# EAGLE board version4 (EAGLE 9.2.2)
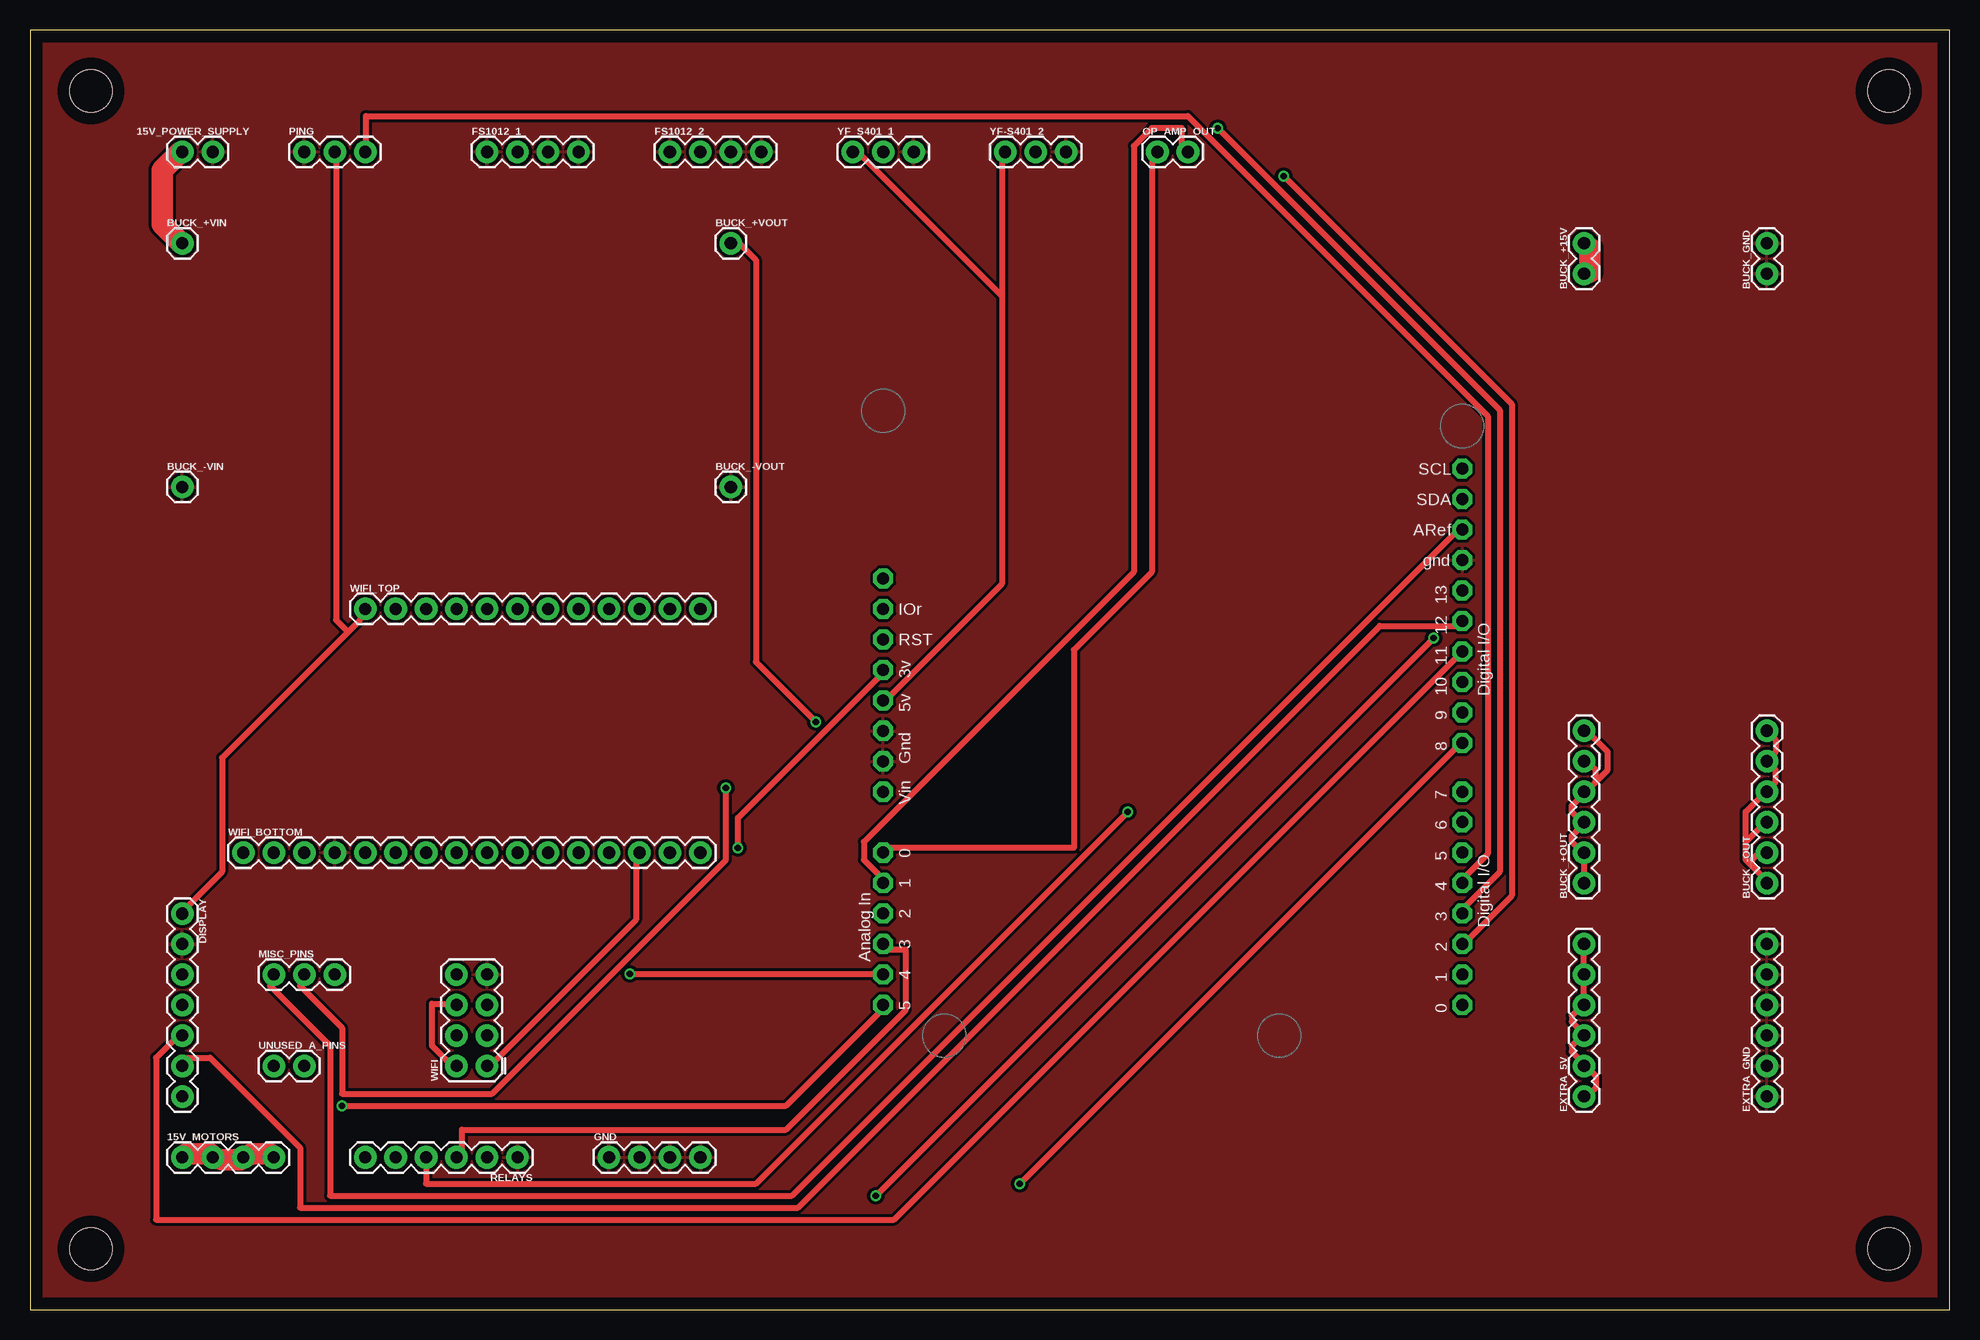
[diagram p0: board, top side]
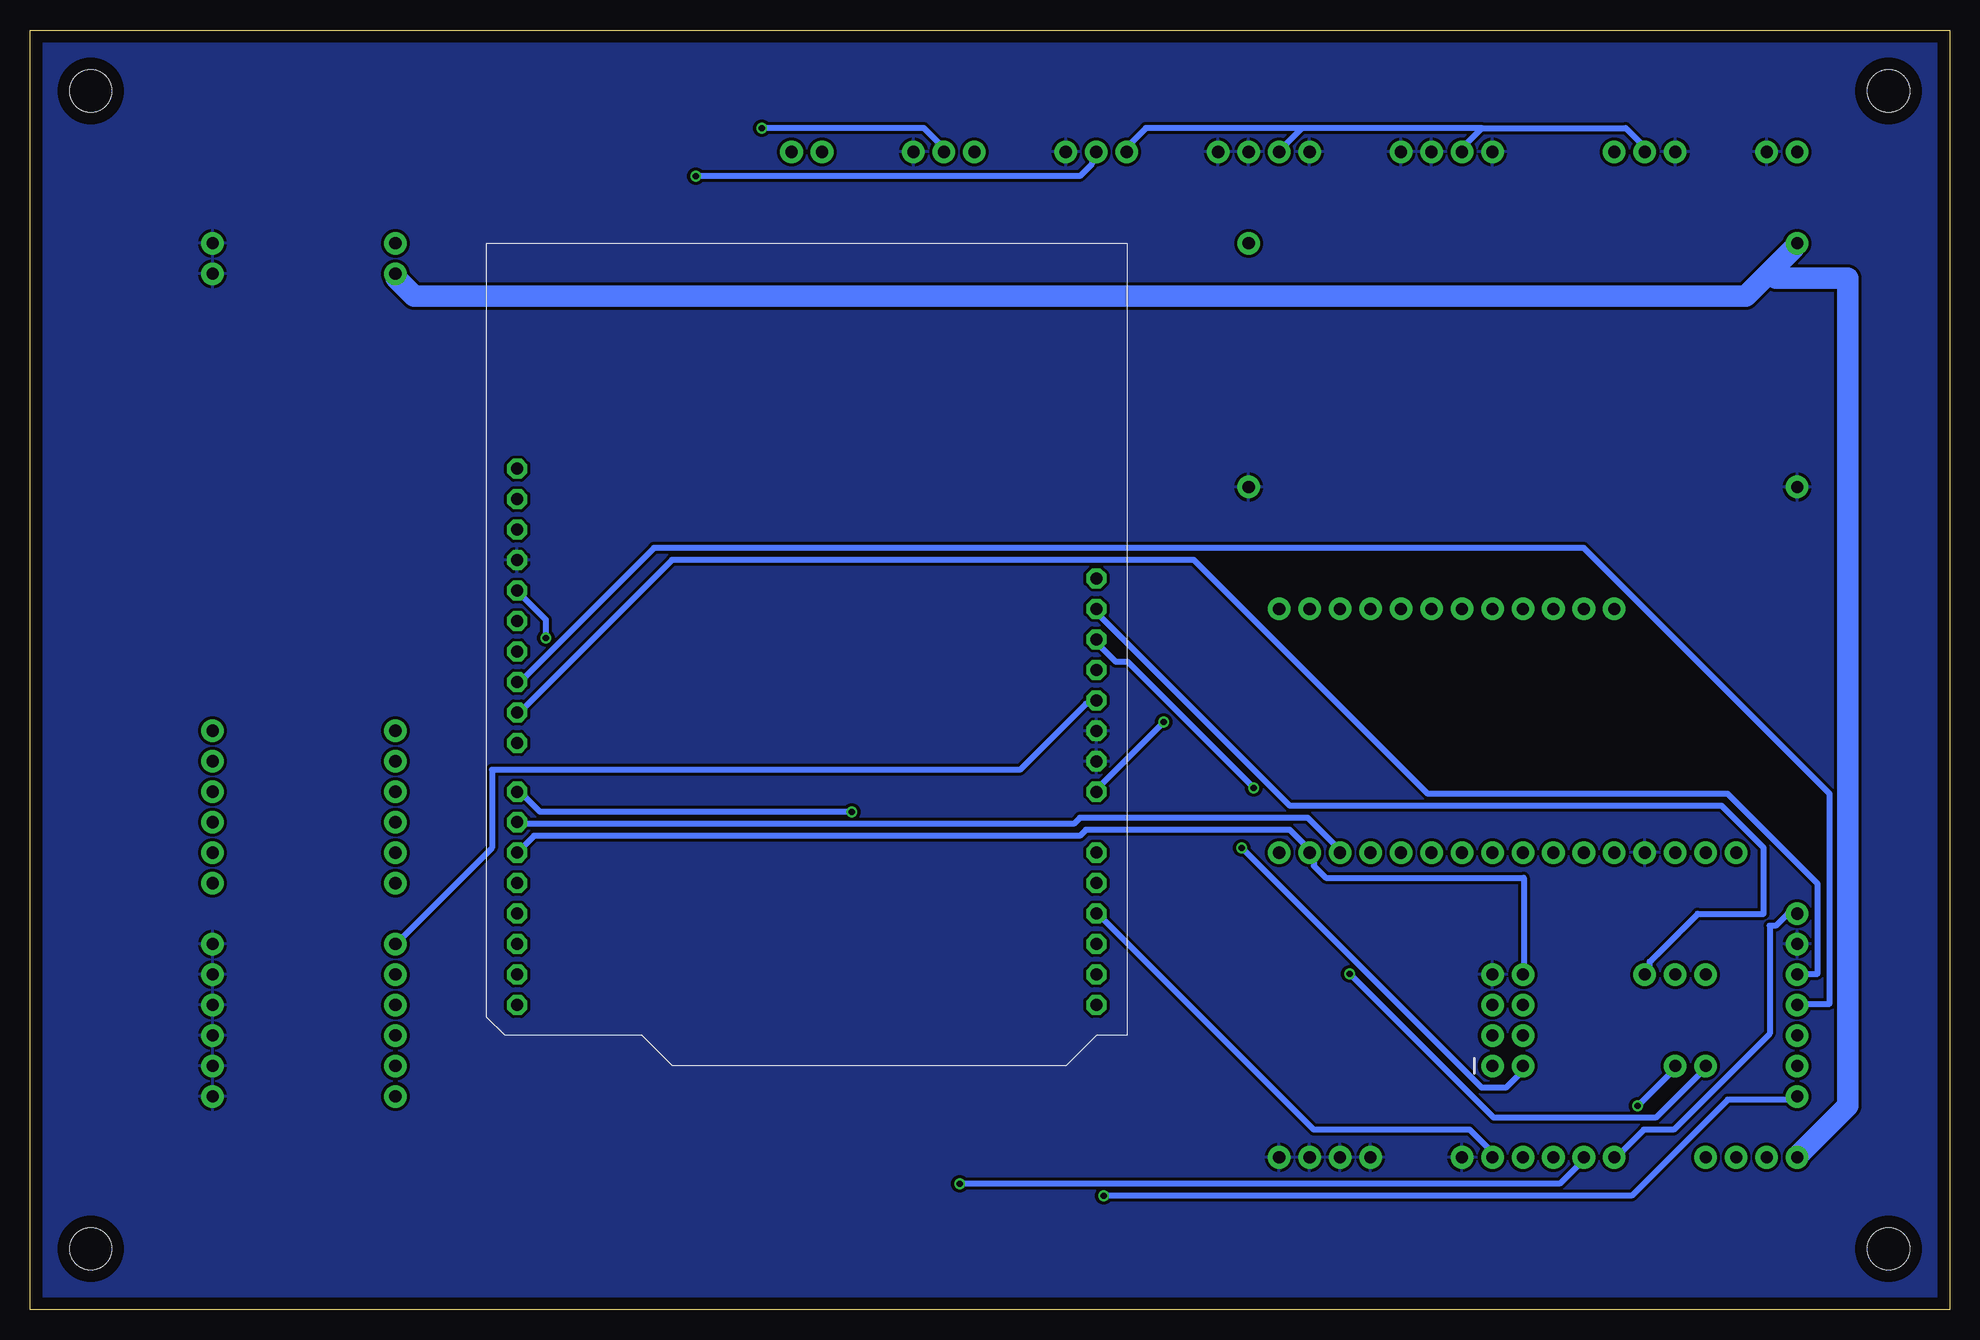
[diagram p1: board, bottom side, seen from below]

Size 160 x 106.68 mm. Coordinates in mm from the lower left corner, seen from the top.
Outline: 0,0 160,0 160,106.68 0,106.68 0,0
Copper layers (1*16): Top 0.035mm / dielectric 1.5mm / Bottom 0.035mm
Design rules "default": minimum track width 6mil, minimum drill 0.35mm, track to track 6mil, track to pad 6mil, pad to pad 6mil, via to via 6mil, smd to smd 6mil, copper to edge 40mil, drill to drill 6mil, minimum pad ring 10mil, minimum via ring 8mil, stop-mask expansion 4mil, vias tented up to drill 0mil, thermal gap 10mil
Net classes: 0 default: width 0.508 mm, drill 0.508 mm, clearance 0.254 mm; 1 +15V: width 1.778 mm, drill 0.508 mm, clearance 0.254 mm
Holes 3.5 mm at 5.08,5.08 5.08,101.6 154.94,101.6 154.94,5.08

## Footprints (pad centres in the part's own frame; a part is rotated, then mirrored left to right if it is on the bottom)
1X04 = drill 1.016 pad 1.88: 1 0,0; 2 2.54,0; 3 5.08,0; 4 7.62,0
1X02 = drill 1.016 pad 1.88: 1 0,0; 2 2.54,0
1X06 = drill 1.016 pad 1.88: 1 0,0; 2 2.54,0; 3 5.08,0; 4 7.62,0; 5 10.16,0; 6 12.7,0
1X01 = drill 1.016 pad 1.88: 1 0,0
1X07 = drill 1.016 pad 1.88: 1 0,0; 2 2.54,0; 3 5.08,0; 4 7.62,0; 5 10.16,0; 6 12.7,0; 7 15.24,0
1X03 = drill 1.016 pad 1.88: 1 0,0; 2 2.54,0; 3 5.08,0
ARDUINOR3-BPLACE = drill 1 pad 1.676 octagon: 3V 35.56,2.54; 5V 38.1,2.54; A0 50.8,2.54; A1 53.34,2.54; A2 55.88,2.54; A3 58.42,2.54; A4 60.96,2.54; A5 63.5,2.54; AREF 23.876,50.8; D0 63.5,50.8; D1 60.96,50.8; D2 58.42,50.8; D3 55.88,50.8; D4 53.34,50.8; D5 50.8,50.8; D6 48.26,50.8; D7 45.72,50.8; D8 41.656,50.8; D9 39.116,50.8; D10 36.576,50.8; D11 34.036,50.8; D12 31.496,50.8; D13 28.956,50.8; GND 26.416,50.8; GND1 43.18,2.54; GND2 40.64,2.54; IOREF 30.48,2.54; RESERVED 27.94,2.54; RESET 33.02,2.54; SCL 18.796,50.8; SDA 21.336,50.8; VIN 45.72,2.54
2X4 = drill 1.016 pad 1.88: 1 -3.81,-1.27; 2 -3.81,1.27; 3 -1.27,-1.27; 4 -1.27,1.27; 5 1.27,-1.27; 6 1.27,1.27; 7 3.81,-1.27; 8 3.81,1.27
1X16 = drill 1.016 pad 1.88: 1 0,0; 2 2.54,0; 3 5.08,0; 4 7.62,0; 5 10.16,0; 6 12.7,0; 7 15.24,0; 8 17.78,0; 9 20.32,0; 10 22.86,0; 11 25.4,0; 12 27.94,0; 13 30.48,0; 14 33.02,0; 15 35.56,0; 16 38.1,0
1X12 = drill 1.016 pad 1.88: 1 0,0; 2 2.54,0; 3 5.08,0; 4 7.62,0; 5 10.16,0; 6 12.7,0; 7 15.24,0; 8 17.78,0; 9 20.32,0; 10 22.86,0; 11 25.4,0; 12 27.94,0

## Placement (x,y rotation side)
15V_MOTORS  [1X04]  12.7,12.7 0 top
15V_POWER_SUPPLY  [1X02]  12.7,96.52 0 top
BUCK_+15V  [1X02]  129.54,86.36 90 top
BUCK_+OUT  [1X06]  129.54,35.56 90 top
BUCK_+VIN  [1X01]  12.7,88.9 0 top
BUCK_+VOUT  [1X01]  58.42,88.9 0 top
BUCK_-OUT  [1X06]  144.78,35.56 90 top
BUCK_-VIN  [1X01]  12.7,68.58 0 top
BUCK_-VOUT  [1X01]  58.42,68.58 0 top
BUCK_GND  [1X02]  144.78,86.36 90 top
DISPLAY  [1X07]  12.7,33.02 270 top
EXTRA_5V  [1X06]  129.54,17.78 90 top
EXTRA_GND  [1X06]  144.78,17.78 90 top
FS1012_1  [1X04]  38.1,96.52 0 top
FS1012_2  [1X04]  53.34,96.52 0 top
GND  [1X04]  48.26,12.7 0 top
MISC_PINS  [1X03]  20.32,27.94 0 top
OP_AMP_OUT  [1X02]  93.98,96.52 0 top
PING  [1X03]  22.86,96.52 0 top
RELAYS  [1X06]  40.64,12.7 180 top
U1  ARDUINOR3-BPLACE  [ARDUINOR3-BPLACE]  68.58,88.9 270 top
UNUSED_A_PINS  [1X02]  20.32,20.32 0 top
WIFI  [2X4]  36.83,24.13 90 top
WIFI_BOTTOM  [1X16]  17.78,38.1 0 top
WIFI_TOP  [1X12]  27.94,58.42 0 top
YF-S401_2  [1X03]  81.28,96.52 0 top
YF_S401_1  [1X03]  68.58,96.52 0 top

## Library data of the parts
15V_MOTORS FS1012_1 FS1012_2 GND = SparkFun-Connectors; PROD_ID: CONN-09696
15V_POWER_SUPPLY BUCK_+15V BUCK_+VIN BUCK_+VOUT BUCK_-VIN BUCK_-VOUT BUCK_GND DISPLAY MISC_PINS OP_AMP_OUT PING UNUSED_A_PINS WIFI WIFI_BOTTOM WIFI_TOP YF-S401_2 YF_S401_1 = SparkFun-Connectors
BUCK_+OUT BUCK_-OUT EXTRA_5V EXTRA_GND RELAYS = SparkFun-Connectors; PROD_ID: CONN-08437
U1 = adafruit

## Nets
+3V: U1.3V WIFI.2 WIFI.6
+5V: DISPLAY.1 EXTRA_5V.1 EXTRA_5V.2 EXTRA_5V.3 EXTRA_5V.4 EXTRA_5V.5 EXTRA_5V.6 FS1012_1.2 FS1012_2.2 PING.2 RELAYS.6 U1.5V WIFI_TOP.1 YF-S401_2.1 YF_S401_1.1
+15V [+15V]: 15V_MOTORS.1 15V_MOTORS.2 15V_MOTORS.3 15V_MOTORS.4 15V_POWER_SUPPLY.1 BUCK_+15V.1 BUCK_+15V.2 BUCK_+VIN.1
/RESET: MISC_PINS.2 U1.RESET
A0: OP_AMP_OUT.1 U1.A0
A1: OP_AMP_OUT.2 U1.A1
A2: RELAYS.2 U1.A2
A3: RELAYS.3 U1.A3
A4/SDA: U1.A4 UNUSED_A_PINS.1
A5/SCL: U1.A5 UNUSED_A_PINS.2
AREF: MISC_PINS.1 U1.AREF
BUCK_+VOUT: BUCK_+VOUT.1 U1.VIN
D0: U1.D0
D1: U1.D1
D2: U1.D2 YF_S401_1.2
D3: U1.D3 YF-S401_2.2
D4: PING.3 U1.D4
D5: U1.D5 WIFI.8 WIFI_BOTTOM.15
D6: U1.D6 WIFI.1 WIFI_BOTTOM.14
D7: RELAYS.4 U1.D7
D8: RELAYS.5 U1.D8
D9: DISPLAY.3 U1.D9
D10: DISPLAY.4 U1.D10
D11: DISPLAY.5 U1.D11
D12: DISPLAY.6 U1.D12
D13: DISPLAY.7 U1.D13
GND: 15V_POWER_SUPPLY.2 BUCK_-VIN.1 BUCK_-VOUT.1 BUCK_GND.1 BUCK_GND.2 DISPLAY.2 EXTRA_GND.1 EXTRA_GND.2 EXTRA_GND.3 EXTRA_GND.4 EXTRA_GND.5 EXTRA_GND.6 FS1012_1.1 FS1012_1.3 FS1012_1.4 FS1012_2.1 FS1012_2.3 FS1012_2.4 GND.1 GND.2 GND.3 GND.4 PING.1 RELAYS.1 U1.GND U1.GND1 U1.GND2 WIFI.7 WIFI_BOTTOM.4 YF-S401_2.3 YF_S401_1.3
IOREF: MISC_PINS.3 U1.IOREF
N$6: BUCK_+OUT.1 BUCK_+OUT.2 BUCK_+OUT.3 BUCK_+OUT.4 BUCK_+OUT.5 BUCK_+OUT.6
N$8: BUCK_-OUT.1 BUCK_-OUT.2 BUCK_-OUT.3 BUCK_-OUT.4 BUCK_-OUT.5 BUCK_-OUT.6

## Tracks (layer width: path | path; a pad name or v marks a point on that pad's centre or on a via)
+3V  (via drill 0.51)
  Top 0.508: v59,38.5 59,41 71,53 U1.3V | WIFI.6 35.5,25.5 33.5,25.5 33.5,22 35.5,20 WIFI.2
  Bottom 0.508: v59,38.5 39,18.5 37,18.5 35.5,20 WIFI.2
+5V
  Top 0.508: 26.5,56.5 27.5,57.5 27.5,58 WIFI_TOP.1 | 26.5,56.5 16,46 16,36.5 13,33.5 DISPLAY.1 | EXTRA_5V.1 130,18 130.5,18.5 130.5,19.5 130,20 EXTRA_5V.2 129.5,20.5 128.5,21.5 128.5,22 129.5,23 | 129.5,23 128.5,24 128.5,24.5 129.5,25.5 | 129.5,25.5 129.5,27.5 EXTRA_5V.5 129.5,28 129.5,30 EXTRA_5V.6 | 129.5,25.5 EXTRA_5V.4 | 129.5,23 EXTRA_5V.3 | 81,84.5 81,96.5 YF-S401_2.1 | 81,84.5 81,60.5 71.5,51 U1.5V | 81,84.5 69,96.5 YF_S401_1.1 | 26.5,56.5 25.5,57.5 25.5,96.5 PING.2
  Bottom 0.508: RELAYS.6 27.5,13 25.5,15 23,15 15,23 15,32 14.5,32 13.5,33 13,33 DISPLAY.1 | 39,98.5 27,98.5 25.5,97 PING.2 | 39,98.5 40.5,97 FS1012_1.2 | 54,98.5 55.5,97 FS1012_2.2 | 39,98.5 54,98.5 | 54,98.5 67,98.5 68.5,97 YF_S401_1.1 | EXTRA_5V.6 129.5,30.5 121.5,38.5 121.5,45 77.5,45 72,50.5 71.5,50.5 U1.5V
+15V
  Top 1.778: 15V_MOTORS.1 13,13 15,13 15V_MOTORS.2 16,12.5 17.5,12.5 15V_MOTORS.3 18.5,13 20,13 15V_MOTORS.4 | BUCK_+15V.1 130,86.5 130,88.5 BUCK_+15V.2 | BUCK_+VIN.1 12.5,89 11,90.5 11,95 12.5,96.5 15V_POWER_SUPPLY.1
  Bottom 1.778: 15,86.5 13,88.5 BUCK_+VIN.1 | 15,86.5 17,84.5 128,84.5 129.5,86 BUCK_+15V.1 | 15V_MOTORS.1 12.5,13 8.5,17 8.5,86 14.5,86 15,86.5
/RESET  (via drill 0.51)
  Top 0.508: v58,43.5 58,37.5 38.5,18 26,18 26,23.5 22.5,27 22.5,27.5 MISC_PINS.2
  Bottom 0.508: v58,43.5 68.5,54 69.5,54 71,55.5 U1.RESET
A0
  Top 0.508: U1.A0 71.5,38.5 87,38.5 87,55 93.5,61.5 93.5,96.5 OP_AMP_OUT.1
A1
  Top 0.508: U1.A1 71,36 69.5,37.5 69.5,39 92,61.5 92,97 93.5,98.5 96,98.5 96,97 96.5,96.5 OP_AMP_OUT.2
A2
  Bottom 0.508: U1.A2 71,33 53,15 40,15 38,13 RELAYS.2
A3
  Top 0.508: U1.A3 71.5,30 73,30 73,25 63,15 36,15 36,13 RELAYS.3
A4/SDA  (via drill 0.51)
  Top 0.508: v50,28 71,28 U1.A4
  Bottom 0.508: v50,28 38,16 24.5,16 20.5,20 UNUSED_A_PINS.1
A5/SCL  (via drill 0.51)
  Top 0.508: v26,17 63,17 71,25 U1.A5
  Bottom 0.508: v26,17 23,20 UNUSED_A_PINS.2
AREF
  Top 0.508: U1.AREF 119,65 63.5,9.5 25,9.5 25,22 20,27 20,27.5 MISC_PINS.1
BUCK_+VOUT  (via drill 0.51)
  Top 0.508: v65.5,49 60.5,54 60.5,87.5 59,89 58.5,89 BUCK_+VOUT.1
  Bottom 0.508: v65.5,49 71,43.5 U1.VIN
D2  (via drill 0.51)
  Top 0.508: v104.5,94.5 123.5,75.5 123.5,34.5 119.5,30.5 U1.D2
  Bottom 0.508: v104.5,94.5 72.5,94.5 71.5,95.5 71.5,96.5 YF_S401_1.2
D3  (via drill 0.51)
  Top 0.508: v99,98.5 122.5,75 122.5,36.5 119.5,33.5 U1.D3
  Bottom 0.508: v99,98.5 85.5,98.5 84,97 YF-S401_2.2
D4
  Top 0.508: U1.D4 119.5,36 121.5,38 121.5,74.5 96.5,99.5 28,99.5 28,97 PING.3
D5
  Bottom 0.508: U1.D5 119,38.5 118,39.5 72.5,39.5 72,40 55,40 53.5,38.5 WIFI_BOTTOM.15 53,38 53,37 52,36 35.5,36 35.5,28 WIFI.8
D6
  Top 0.508: WIFI.1 38.5,20.5 50.5,32.5 50.5,38 WIFI_BOTTOM.14
  Bottom 0.508: U1.D6 119,40.5 73,40.5 72.5,41 53.5,41 51,38.5 WIFI_BOTTOM.14
D7  (via drill 0.51)
  Top 0.508: v91.5,41.5 60.5,10.5 33,10.5 33,12.5 RELAYS.4
  Bottom 0.508: v91.5,41.5 117.5,41.5 119,43 U1.D7
D8  (via drill 0.51)
  Top 0.508: v82.5,10.5 119,47 U1.D8
  Bottom 0.508: v82.5,10.5 32.5,10.5 31,12 31,12.5 30.5,12.5 RELAYS.5
D9
  Bottom 0.508: U1.D9 119,50 106.5,62.5 63,62.5 43.5,43 18.5,43 11,35.5 11,28 12.5,28 DISPLAY.3
D10
  Bottom 0.508: U1.D10 119,52.5 108,63.5 30.5,63.5 10,43 10,25.5 12.5,25.5 DISPLAY.4
D11
  Top 0.508: U1.D11 119,54.5 72,7.5 10.5,7.5 10.5,21 12.5,23 DISPLAY.5
D12
  Top 0.508: U1.D12 119,57 112.5,57 64,8.5 22.5,8.5 22.5,13.5 15,21 12.5,21 12.5,20.5 DISPLAY.6
D13  (via drill 0.51)
  Top 0.508: v70.5,9.5 v117,56
  Bottom 0.508: v117,56 117,57.5 119,59.5 U1.D13 | v70.5,9.5 26.5,9.5 18.5,17.5 13,17.5 DISPLAY.7
GND
  pour Bottom: -2.54,109.22 162.56,109.22 162.56,-2.54 -2.54,-2.54
  pour Top: -2.54,109.22 162.56,109.22 162.56,-2.54 -2.54,-2.54
IOREF
  Bottom 0.508: U1.IOREF 71,58 55,42 19,42 15.5,38.5 15.5,33 21,33 25,29 25,28 MISC_PINS.3
N$6
  Top 0.508: 129.5,38 129.5,36 BUCK_+OUT.1 | 129.5,40.5 128.5,39.5 128.5,39 129.5,38 | 129.5,38 BUCK_+OUT.2 | 129.5,40.5 128.5,41.5 128.5,42 129.5,43 BUCK_+OUT.4 130,43.5 130.5,44 | 129.5,40.5 BUCK_+OUT.3 | 130.5,44 130.5,45 130,45.5 BUCK_+OUT.5 | 130.5,44 131.5,45 131.5,46.5 130,48 BUCK_+OUT.6
N$8
  Top 0.508: BUCK_-OUT.6 145,48 145.5,47.5 145.5,46.5 145,46 BUCK_-OUT.5 145.5,45 145.5,44 145,43.5 BUCK_-OUT.4 144.5,43 143,41.5 143,39 | 143.5,37 144.5,36 BUCK_-OUT.1 | 143.5,37 143.5,37.5 144.5,38.5 BUCK_-OUT.2 | 143,39 144.5,40.5 BUCK_-OUT.3 | 143,39 143,37.5 143.5,37